# EAGLE board EURO32_lower (EAGLE 9.6.2)

Size 20 x 110 mm. Coordinates in mm from the lower left corner, seen from the top.
Outline: 0,0 0,110 20,110 20,0 0,0
Copper layers (1*16): Top 0.035mm / dielectric 1.5mm / Bottom 0.035mm
Design rules "default": minimum track width 6mil, minimum drill 0.35mm, track to track 6mil, track to pad 6mil, pad to pad 6mil, via to via 6mil, smd to smd 6mil, copper to edge 40mil, drill to drill 6mil, minimum pad ring 10mil, minimum via ring 8mil, stop-mask expansion 4mil, vias tented up to drill 0mil, thermal gap 10mil
Milling: area 1.2,77.3 to 7.8,83.8; area 12.2,77.3 to 18.8,83.8; area 2.7,101.2 to 6.3,104.8; area 13.4,100.9 to 17.6,105.1; area 2.7,90.8 to 6.3,94.4; area 13.7,90.8 to 17.3,94.4; area 2.5,27.4 to 6.5,31.4; area 13.3,27.2 to 17.7,31.6; area 2.5,15.4 to 6.5,19.4; area 13.5,15.4 to 17.5,19.4; area 2.5,5 to 6.5,9; area 13.5,5 to 17.5,9; 4 lines

## Footprints (pad centres in the part's own frame; a part is rotated, then mirrored left to right if it is on the bottom)
1X08_ROUND = drill 1.016 pad 1.88: 1 0,0; 2 2.54,0; 3 5.08,0; 4 7.62,0; 5 10.16,0; 6 12.7,0; 7 15.24,0; 8 17.78,0
1X17 = drill 1.016 pad 1.88: 1 0,0; 2 2.54,0; 3 5.08,0; 4 7.62,0; 5 10.16,0; 6 12.7,0; 7 15.24,0; 8 17.78,0; 9 20.32,0; 10 22.86,0; 11 25.4,0; 12 27.94,0; 13 30.48,0; 14 33.02,0; 15 35.56,0; 16 38.1,0; 17 40.64,0
1X04 = drill 1.016 pad 1.88 square: 1 0,0 | drill 1.016 pad 1.88: 2 2.54,0; 3 5.08,0; 4 7.62,0
WQP-PJ301M-12_JACK = drill 1.1: P$1 0,5; P$2 0,-3.5; P$3 -1.778,-5.23

## Placement (x,y rotation side)
JP1  [1X08_ROUND]  10,97 270 top
JP2  [1X17]  10,53.85 270 top
JP3  [1X04]  13.8,71 180 top
U$1  WQP-PJ301M-12_JACK  [WQP-PJ301M-12_JACK]  15.5,7 180 top
U$2  WQP-PJ301M-12_JACK  [WQP-PJ301M-12_JACK]  4.5,7 180 top
U$3  WQP-PJ301M-12_JACK  [WQP-PJ301M-12_JACK]  15.5,17.4 0 top
U$4  WQP-PJ301M-12_JACK  [WQP-PJ301M-12_JACK]  4.5,17.4 0 top
U$5  WQP-PJ301M-12_JACK  [WQP-PJ301M-12_JACK]  15.5,29.4 180 top
U$6  WQP-PJ301M-12_JACK  [WQP-PJ301M-12_JACK]  4.5,29.4 180 top
U$7  WQP-PJ301M-12_JACK  [WQP-PJ301M-12_JACK]  4.5,80.6 0 top
U$8  WQP-PJ301M-12_JACK  [WQP-PJ301M-12_JACK]  15.5,80.6 0 top
U$9  WQP-PJ301M-12_JACK  [WQP-PJ301M-12_JACK]  15.5,92.6 180 top
U$10  WQP-PJ301M-12_JACK  [WQP-PJ301M-12_JACK]  4.5,92.6 180 top
U$11  WQP-PJ301M-12_JACK  [WQP-PJ301M-12_JACK]  15.5,103 0 top
U$12  WQP-PJ301M-12_JACK  [WQP-PJ301M-12_JACK]  4.5,103 0 top

## Library data of the parts
JP1-JP3 = SparkFun-Connectors
U$1-U$12 = thonkiconn